# Altium PCB PCB.PcbDoc (part 3 of 3)
Units mm, origin at the board's own origin, x right, y up, seen from the top; angles counter-clockwise.
Board outline 152.4 x 101.6 mm, 2 copper layers (Top Layer, Bottom Layer); 124 components, 87 nets, 375 pads, 305 vias.
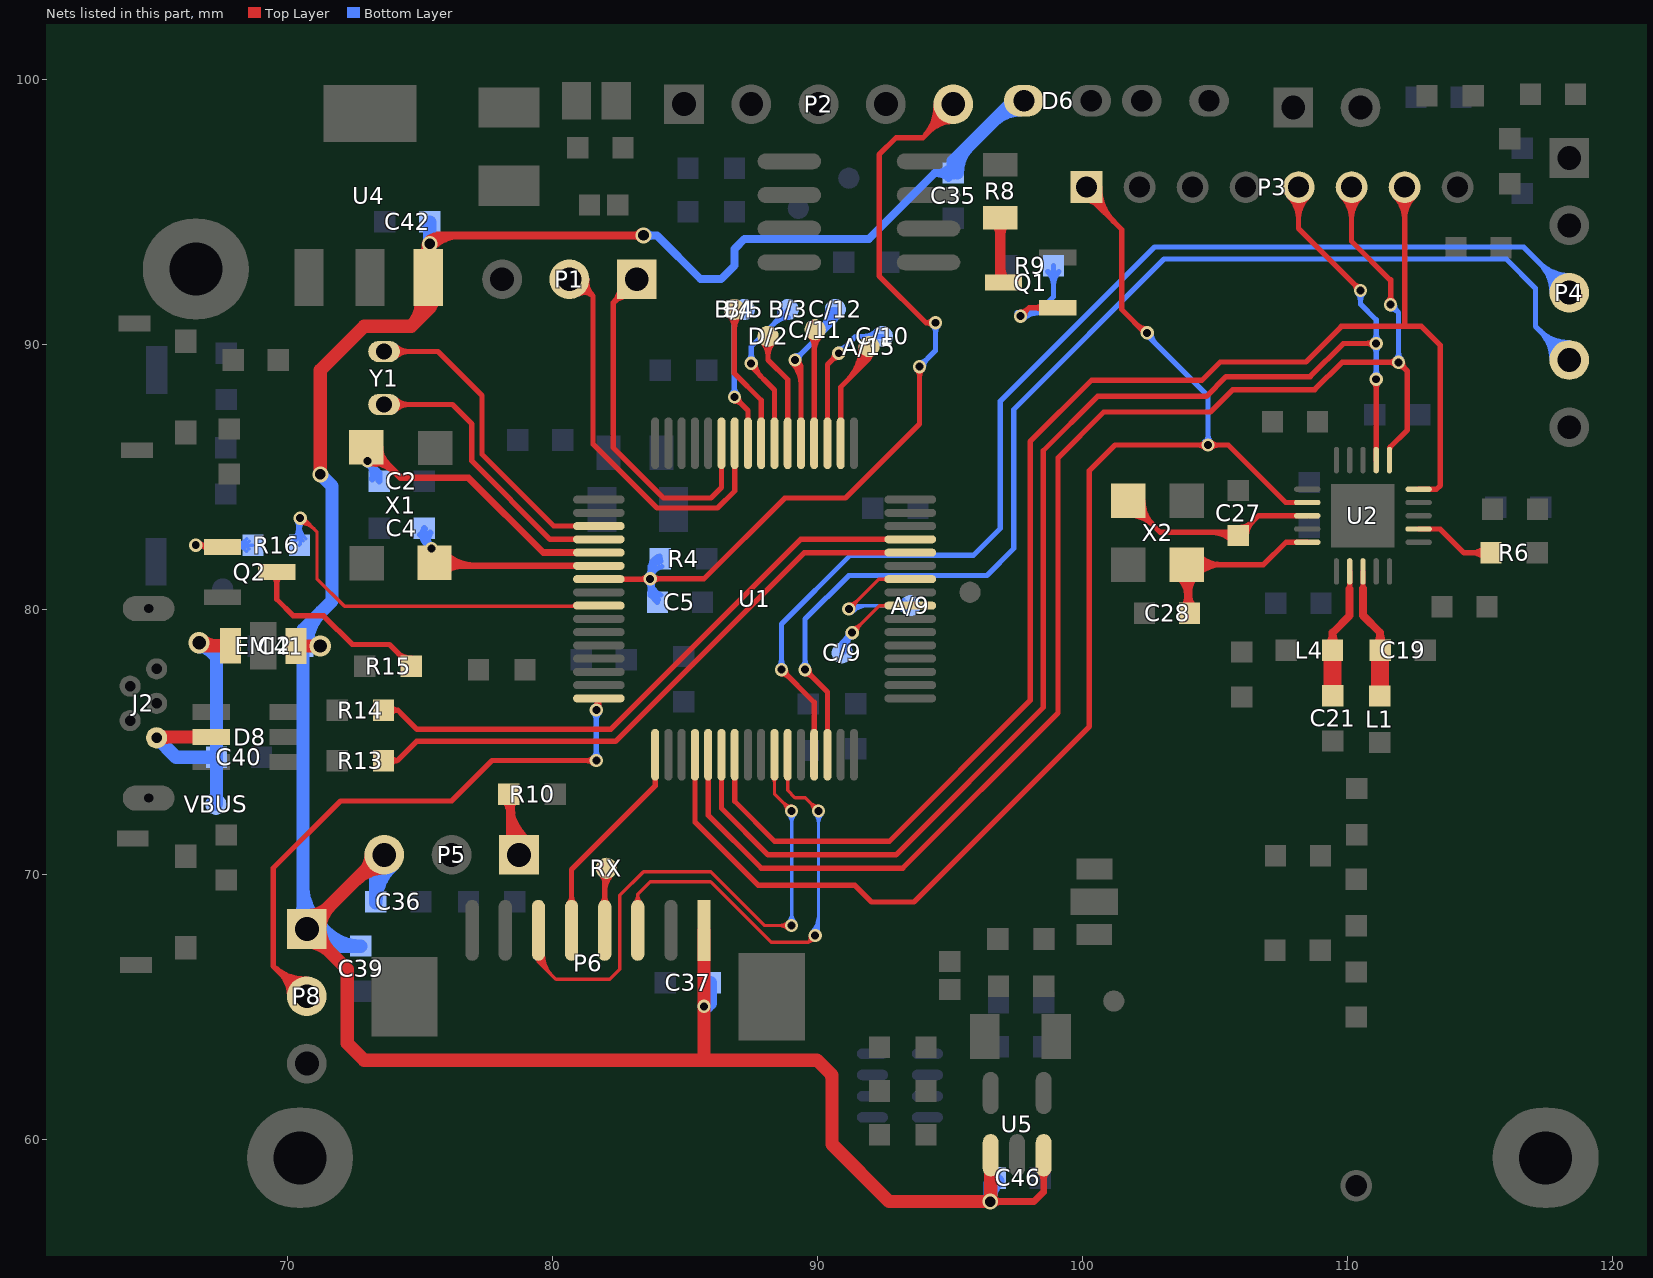
[diagram p3: the nets of this part, all layers, seen from the top]

## Via types
v1: diameter 0.5, hole 0.3, Top Layer to Bottom Layer, 278 vias
v2: diameter 0.6, hole 0.4, Top Layer to Bottom Layer, 23 vias
v3: diameter 0.8, hole 0.5, Top Layer to Bottom Layer, 2 vias
v4: diameter 0.8, hole 0.8, Top Layer to Bottom Layer, 2 vias

## Nets (pads, with @x,y where several pads share a name; then routed paths per layer and width w, separated by ;. In a path a pad name is that pad's centre, name@x,y a point inside that pad or via, vN(x,y) a via of type N, cw(c..) or ccw(c..) an arc to the next point about the centre after c; other vN are vias at no path point) (continued)
NetP5_1: P5.1 R10.1 | length 11.1
  Top Layer w0.2: R10.1@78.147,72.806 cw(c77.635,72.294) 78.359,72.294 cw(c79.083,72.294) R10.1@78.571,72.806 ; R10.1@78.196,72.767 cw(c77.8,72.154) 78.513,72.307 ; P5.1@78.28,71.199 ccw(c78.091,71.388) P5.1@78.359,71.388 ; 78.359,71.695 ccw(c79.584,71.695) P5.1@78.773,70.776 ; 78.359,72.138 ccw(c79.975,72.138) P5.1@78.905,70.926 ; 78.359,72.581 ccw(c80.367,72.581) P5.1@79.038,71.076 ; 78.512,72.314 cw(c79.215,72.465) R10.1@78.611,72.856 ; P5.1@78.74,70.739 78.359,71.12 R10.1@78.359,73.025 ccw(c80.759,73.025) P5.1@79.17,71.226
NetP6_4: P6.4 RX.1 | length 4.4
  Top Layer w0.2: RX.1@81.83,70.019 cw(c81.479,69.668) 81.975,69.668 ; P6.4@81.869,68.897 ccw(c81.613,69.153) 81.975,69.153 ccw(c82.337,69.153) P6.4@82.081,68.897 ; P6.4@81.975,67.891 81.975,70.164 RX.1@82.042,70.231 ; 81.975,69.345 cw(c82.928,69.345) RX.1@82.254,70.019 ; 81.975,69.828 cw(c82.445,69.828) RX.1@82.113,70.16
NetQ1_2: Q1.2 R9.2 | length 7.6
  Top Layer w0.2: v1(97.663,91.059) 97.983,91.379 Q1.2@99.069,91.379 ; v1@97.663,91.209 ccw(c97.663,91.571) 97.919,91.315 ccw(c98.175,91.059) v1@97.813,91.059 ; Q1.2@98.528,91.238 ccw(c98.186,90.896) 98.186,91.379 ccw(c98.186,91.862) Q1.2@98.528,91.52
  Bottom Layer w0.2: v1(97.663,91.059) 97.536,91.186 98.298,91.186 ; v1@97.773,90.957 cw(c98.298,90.47) 98.298,91.186 ; R9.2@98.693,92.745 cw(c98.181,92.233) 98.905,92.233 cw(c99.629,92.233) R9.2@99.117,92.745 ; R9.2@98.905,92.964 98.905,91.793 98.298,91.186
NetQ1_3: Q1.3 R8.1 | length 3.7
  Top Layer w0.4: R8.1@96.724,94.597 cw(c96.297,94.17) 96.901,94.17 cw(c97.505,94.17) R8.1@97.078,94.597 ; 96.901,92.855 ccw(c97.545,92.855) Q1.3@97.09,92.4 ; R8.1@96.901,94.488 96.901,92.329 Q1.3@97.019,92.329
NetQ2_2: Q2.2 R16.1 | length 8.3
  Top Layer w0.127: v1@66.68,82.291 cw(c66.998,81.973) 66.998,82.423 cw(c66.998,82.873) v1@66.68,82.555 ; v1@66.699,82.314 cw(c66.783,82.253) 66.81,82.353 cw(c66.837,82.453) v1@66.733,82.442 ; v1@66.718,82.5 ccw(c66.806,82.541) 66.832,82.447 ccw(c66.876,82.283) v1@66.719,82.349 ; v1@66.743,82.423 ccw(c66.743,82.769) Q2.2@66.988,82.524 ; 66.803,82.423 cw(c66.803,82.091) Q2.2@67.068,82.291 ; Q2.2@66.966,82.215 ccw(c66.548,81.899) v1(66.548,82.423) 67.489,82.423 Q2.2@67.555,82.357
  Bottom Layer w0.127: v1(66.548,82.423) R16.1@68.707,82.423 ; v1@66.68,82.291 cw(c66.998,81.973) 66.998,82.423 cw(c66.998,82.873) v1@66.68,82.555 ; R16.1@68.469,82.185 ccw(c67.895,81.611) 67.895,82.423 ccw(c67.895,83.235) R16.1@68.469,82.661 ; R16.1@68.559,82.275 ccw(c68.201,81.917) 68.201,82.423 ccw(c68.201,82.929) R16.1@68.559,82.571
NetQ2_3: Q2.3 R15.1 | length 9.2
  Top Layer w0.2: Q2.3@69.464,81.266 cw(c69.122,80.924) 69.605,80.924 cw(c70.088,80.924) Q2.3@69.746,81.266 ; Q2.3@69.605,81.407 69.605,80.382 70.231,79.756 71.374,79.756 72.453,78.676 73.85,78.676 R15.1@74.676,77.851 ; Q2.3@69.859,81.407 Q2.3@69.859,81.534 ; 74.153,78.374 ccw(c74.676,78.897) R15.1@74.676,78.157 ; 74.168,78.359 cw(c73.667,77.857) R15.1@74.376,77.857
NetR6_1: R6.1 U2.17 | length 4.2
  Top Layer w0.2: U2.17@112.681,83.03 113.494,83.03 114.391,82.133 R6.1@115.407,82.133 ; R6.1@115.195,81.921 ccw(c114.683,81.409) 114.683,82.133 ccw(c114.683,82.857) R6.1@115.195,82.345
NetTP9_1: C/9.1 U1.40 | length 7.3
  Top Layer w0.127: v1(91.313,79.121) 92.333,80.141 U1.40@93.505,80.141 ; v1@91.313,79.307 ccw(c91.313,79.758) 91.631,79.439 ccw(c91.95,79.121) v1@91.499,79.121 ; U1.40@92.619,80.08 ccw(c92.471,79.932) 92.471,80.141 ccw(c92.471,80.35) U1.40@92.619,80.202
  Bottom Layer w0.2: C/9.1@90.932,78.359 90.932,78.74 v1(91.313,79.121) ccw(c91.708,78.726) C/9.1@91.203,78.487 ; C/9.1@90.98,78.69 cw(c91.51,78.384) v1@91.352,78.976 ; C/9.1@91.022,78.402 cw(c91.435,78.597) 91.112,78.92 ; v1@91.163,79.121 cw(c90.801,79.121) 91.057,78.865 cw(c91.313,78.609) v1@91.313,78.971 ; v1@91.177,79.058 cw(c90.992,78.972) 91.168,78.871 cw(c91.345,78.769) v1@91.326,78.972
NRST: C5.1 P2.5 R4.1 U1.7 | length 45.2
  Top Layer w0.2: U1.7@81.755,81.141 v1@83.681,81.141 ; 83.302,81.141 ccw(c83.302,81.544) v1@83.587,81.259 ; 83.36,81.141 cw(c83.36,80.82) v1@83.587,81.047 ; v1(83.693,81.153) 85.725,81.153 88.773,84.201 91.059,84.201 93.853,86.995 v1(93.853,89.154) ; v1@83.799,81.047 cw(c84.055,80.791) 84.055,81.153 cw(c84.055,81.515) v1@83.799,81.259 ; v1@93.747,89.048 cw(c93.491,88.792) 93.853,88.792 cw(c94.215,88.792) v1@93.959,89.048 ; 94.23,98.04 cw(c95.123,97.147) P2.5@95.123,98.41 ; 94.306,98.116 ccw(c93.419,99.004) P2.5@94.673,99.045 ; v1@94.353,90.706 ccw(c94.1,90.457) 94.1,90.812 ; v1@94.353,90.917 cw(c94.1,91.166) 94.1,90.812 ; v1(94.459,90.812) 94.1,90.812 ; P2.5@94.473,99.039 cw(c92.787,98.983) 93.98,97.79 ; 94.572,98.382 cw(c95.123,97.83) P2.5@95.123,98.61 ; 94.632,98.442 ccw(c94.05,99.025) P2.5@94.873,99.052 ; P2.5@95.123,99.06 95.123,98.933 93.98,97.79 ; 93.98,97.79 92.964,97.79 92.329,97.155 92.329,92.583 94.1,90.812
  Bottom Layer w0.2: v1@83.587,81.047 cw(c83.331,80.791) 83.693,80.791 cw(c84.055,80.791) v1@83.799,81.047 ; v1@83.587,81.259 ccw(c83.331,81.515) 83.693,81.515 ccw(c84.055,81.515) v1@83.799,81.259 ; v1@83.618,81.283 ccw(c83.507,81.476) 83.722,81.418 ; v1@83.622,81.021 cw(c83.47,80.735) 83.783,80.819 cw(c84.095,80.903) v1@83.82,81.074 ; 83.693,80.843 ccw(c84.221,80.843) C5.1@84.004,80.362 ; v1@83.693,81.062 cw(c84.259,81.062) R4.1@84.138,81.615 ; v1@83.693,81.311 cw(c84.205,81.311) R4.1@84.095,81.811 ; R4.1@83.693,81.559 cw(c84.15,81.559) R4.1@84.053,82.006 ; 83.743,81.498 ccw(c83.995,81.431) v1@83.803,81.255 ; C5.1@83.963,80.264 83.693,80.534 v1(83.693,81.153) ; R4.1@84.074,81.915 83.693,81.534 v1(83.693,81.153) ; C5.1@84.086,80.544 cw(c84.361,81.153) v1(83.693,81.153) ; v1(93.853,89.154) 94.459,89.76 v1(94.459,90.812) ; v1@93.853,89.304 ccw(c93.853,89.666) 94.109,89.41 ccw(c94.365,89.154) v1@94.003,89.154 ; v1@94.353,90.706 cw(c94.097,90.45) 94.459,90.45 cw(c94.821,90.45) v1@94.565,90.706
PA9: A/9.1 U1.42 | length 9.4
  Top Layer w0.127: v1(91.186,80.01) 92.317,81.141 U1.42@93.505,81.141 ; v1@91.186,80.196 ccw(c91.186,80.647) 91.504,80.328 ccw(c91.823,80.01) v1@91.372,80.01 ; U1.42@92.619,81.08 ccw(c92.471,80.932) 92.471,81.141 ccw(c92.471,81.35) U1.42@92.619,81.202
  Bottom Layer w0.127: v1(91.186,80.01) 91.317,80.141 A/9.1@93.505,80.141 ; v1@91.228,79.968 cw(c91.646,79.55) 91.646,80.141 ; v1@91.318,79.878 cw(c91.953,79.243) 91.953,80.141 ; A/9.1@93.267,79.903 ccw(c92.693,79.329) 92.693,80.141 ccw(c92.693,80.953) A/9.1@93.267,80.379 ; A/9.1@93.357,79.993 ccw(c92.999,79.635) 92.999,80.141 ccw(c92.999,80.647) A/9.1@93.357,80.289
PA15: A/15.1 U1.50 | length 7.7
  Top Layer w0.2: U1.50@90.88,86.266 90.88,88.392 91.948,89.46 ; 91.113,88.625 ccw(c89.823,89.916) A/15.1@91.648,89.916 ; 91.455,88.967 ccw(c90.506,89.916) A/15.1@91.848,89.916 ; 91.796,89.308 ccw(c91.189,89.916) A/15.1@92.048,89.916 ; A/15.1@91.829,89.641 cw(c91.751,89.46) 91.948,89.46 ; A/15.1@91.948,89.916 91.948,89.46 ; A/15.1@92.067,89.641 ccw(c92.145,89.46) 91.948,89.46
PB3: B/3.1 U1.55 | length 8.2
  Top Layer w0.2: v1(87.503,89.281) 87.503,89.154 88.38,88.277 U1.55@88.38,86.266 ; v1@87.653,89.281 ccw(c88.322,89.281) 87.849,88.808
  Bottom Layer w0.2: v1@87.397,89.387 ccw(c87.141,89.643) 87.503,89.643 ccw(c87.865,89.643) v1@87.609,89.387 ; v1(87.503,89.281) 87.503,89.916 B/3.1@88.9,91.313 ; B/3.1@88.6,91.313 cw(c87.876,91.313) 88.388,90.801 cw(c88.9,90.289) B/3.1@88.9,91.013
PB4: B/4.1 U1.56 | length 6.6
  Top Layer w0.2: B/4.1@86.656,91.101 cw(c86.144,90.589) 86.868,90.589 cw(c87.592,90.589) B/4.1@87.08,91.101 ; B/4.1@86.868,91.313 86.868,88.9 87.88,87.888 U1.56@87.88,86.266
PB5: B/5.1 U1.57 | length 6.6
  Top Layer w0.2: v1@86.868,87.861 cw(c86.868,87.499) 87.124,87.755 cw(c87.38,88.011) v1@87.018,88.011 ; v1(86.868,88.011) 87.38,87.499 U1.57@87.38,86.266
  Bottom Layer w0.2: v1@86.762,88.117 ccw(c86.506,88.373) 86.868,88.373 ccw(c87.23,88.373) v1@86.974,88.117 ; v1(86.868,88.011) 86.868,90.932 B/5.1@87.249,91.313
PC10: C/10.1 U1.51 | length 7.8
  Top Layer w0.2: U1.51@90.38,86.266 90.38,89.237 v1(90.805,89.662) ; v1@90.655,89.662 cw(c90.293,89.662) 90.549,89.406 cw(c90.805,89.15) v1@90.805,89.512
  Bottom Layer w0.2: v1(90.805,89.662) 91.44,90.297 C/10.1@92.456,90.297 ; v1@90.805,89.812 ccw(c90.805,90.174) 91.061,89.918 ccw(c91.317,89.662) v1@90.955,89.662 ; C/10.1@92.244,90.085 ccw(c91.732,89.573) 91.732,90.297 ccw(c91.732,91.021) C/10.1@92.244,90.509
PC11: C/11.1 U1.52 | length 5.4
  Top Layer w0.2: C/11.1@89.704,90.339 cw(c89.279,89.914) 89.88,89.914 ; U1.52@89.88,86.266 89.88,90.515 C/11.1@89.916,90.551 ; 89.88,89.74 cw(c90.727,89.74) C/11.1@90.128,90.339
PC12: C/12.1 U1.53 | length 10.9
  Top Layer w0.2: v1@89.048,89.302 cw(c88.246,88.5) 89.38,88.5 ; v1(89.154,89.408) 89.38,89.182 ; v1@89.168,89.259 cw(c89.192,88.994) 89.38,89.182 ; v1@89.189,89.443 cw(c88.729,88.983) 89.38,88.983 ; v1@89.303,89.394 ccw(c89.568,89.37) 89.38,89.182 ; U1.53@89.38,86.266 89.38,89.182
  Bottom Layer w0.2: v1(89.154,89.408) 90.678,90.932 C/12.1@90.678,91.313 ; v1@89.154,89.558 ccw(c89.154,89.92) 89.41,89.664 ccw(c89.666,89.408) v1@89.304,89.408 ; 89.896,90.15 ccw(c88.734,91.313) C/12.1@90.378,91.313 ; 90.238,90.492 ccw(c89.417,91.313) C/12.1@90.578,91.313 ; 90.579,90.833 ccw(c90.1,91.313) C/12.1@90.778,91.313
PD2: D/2.1 U1.54 | length 5.5
  Top Layer w0.2: D/2.1@87.926,90.085 cw(c87.414,89.573) 88.138,89.573 cw(c88.862,89.573) D/2.1@88.35,90.085 ; D/2.1@88.138,90.297 88.138,89.408 88.88,88.666 U1.54@88.88,86.266
PM25_RESET: P6.6 U1.26 | length 27.3
  Top Layer w0.127: P6.6@79.398,66.821 cw(c79.344,66.702) 79.475,66.702 ; P6.6@79.407,66.991 ccw(c79.942,66.991) 79.564,66.613 ; P6.6@79.475,67.891 79.475,66.702 ; P6.6@79.534,66.991 ccw(c80.376,66.991) 79.781,66.396 ; P6.6@79.552,66.821 ccw(c79.606,66.702) 79.475,66.702 ; P6.6@79.661,66.991 ccw(c80.809,66.991) 79.998,66.179 ; U1.26@88.319,73.63 cw(c88.171,73.482) 88.38,73.482 cw(c88.589,73.482) U1.26@88.441,73.63 ; U1.26@88.38,74.516 88.38,73.037 v1(89.027,72.39) ; v1@88.841,72.39 ccw(c88.39,72.39) 88.709,72.708 ccw(c89.027,73.027) v1@89.027,72.576 ; v1@88.895,67.94 ccw(c88.577,67.622) 88.577,68.072 ccw(c88.577,68.522) v1@88.895,68.204 ; v1(89.027,68.072) 88.011,68.072 85.979,70.104 83.439,70.104 82.55,69.215 82.55,66.421 82.169,66.04 80.137,66.04 79.475,66.702
  Bottom Layer w0.127: v1@88.895,68.204 ccw(c88.577,68.522) 89.027,68.522 ccw(c89.477,68.522) v1@89.159,68.204 ; v1@88.895,72.258 cw(c88.577,71.94) 89.027,71.94 cw(c89.477,71.94) v1@89.159,72.258 ; v1@88.971,68.25 ccw(c88.947,68.326) 89.027,68.326 ; v1(89.027,72.39) 89.027,68.326 ; v1@89.083,68.25 cw(c89.107,68.326) 89.027,68.326
PM25_SET: P6.3 U1.27 | length 20.9
  Top Layer w0.127: P6.3@83.093,68.923 ccw(c82.775,69.241) 83.225,69.241 ccw(c83.675,69.241) P6.3@83.357,68.923 ; P6.3@83.225,67.891 83.225,69.255 83.693,69.723 85.968,69.723 88.254,67.437 89.662,67.437 ; U1.27@88.819,73.63 cw(c88.671,73.482) 88.88,73.482 cw(c89.089,73.482) U1.27@88.941,73.63 ; U1.27@88.88,74.516 88.88,73.172 89.154,72.898 89.535,72.898 v1(90.043,72.39) ; v1@89.732,67.659 cw(c89.483,67.616) 89.662,67.437 ; v1@89.857,72.39 ccw(c89.406,72.39) 89.725,72.708 ccw(c90.043,73.027) v1@90.043,72.576 ; v1@89.884,67.507 ccw(c89.841,67.258) 89.662,67.437 ; v1(89.916,67.691) 89.662,67.437
  Bottom Layer w0.127: v1@89.784,67.823 ccw(c89.159,68.448) 90.043,68.448 ; v1@89.874,67.733 ccw(c89.466,68.141) 90.043,68.141 ; v1@89.911,72.258 cw(c89.593,71.94) 90.043,71.94 cw(c90.493,71.94) v1@90.175,72.258 ; v1@90.043,67.691 v1(90.043,72.39)
RF_XQ1: C27.1 U2.8 X2.1 | length 13.8
  Top Layer w0.2: X2.1@101.734,83.555 cw(c101.734,82.227) 102.673,83.166 cw(c103.612,84.105) X2.1@102.284,84.105 ; X2.1@101.734,83.755 cw(c101.734,82.91) 102.332,83.508 cw(c102.929,84.105) X2.1@102.084,84.105 ; X2.1@101.734,84.105 102.933,82.907 105.76,82.907 C27.1@105.882,82.784 105.898,82.784 106.644,83.53 U2.8@108.481,83.53 ; 104.856,82.907 cw(c104.856,81.764) C27.1@105.664,82.572 ; 105.339,82.907 cw(c105.339,82.247) C27.1@105.805,82.713 ; 105.448,82.907 ccw(c105.448,83.212) C27.1@105.664,82.996 ; C27.1@105.889,83.084 ccw(c105.889,83.831) 106.417,83.303 ; C27.1@106.189,82.784 cw(c106.89,82.784) 106.394,83.28
RF_XQ2: C28.2 U2.10 X2.3 | length 15.5
  Top Layer w0.2: X2.3@103.545,81.296 cw(c102.346,80.096) C28.2@104.042,80.096 ; X2.3@103.687,81.438 cw(c102.829,80.579) 104.042,80.579 ; C28.2@103.788,80.013 ccw(c103.018,80.496) 103.904,80.699 ; C28.2@103.83,80.066 ccw(c103.318,80.578) 104.042,80.578 ccw(c104.767,80.578) C28.2@104.255,80.066 ; 103.963,80.444 ccw(c104.488,80.564) C28.2@104.202,80.108 ; C28.2@104.042,79.847 104.042,81.577 X2.3@103.934,81.685 106.831,81.685 107.676,82.53 U2.10@108.481,82.53 ; 104.042,80.618 cw(c105.001,80.618) 104.323,81.296 cw(c105.262,80.357) 105.262,81.685 cw(c105.262,83.013) X2.3@104.323,82.074 ; X2.3@104.182,81.438 cw(c104.779,80.84) 104.779,81.685 cw(c104.779,82.53) X2.3@104.182,81.932
RFO_N: C19.1 L1.1 U2.13 | length 5.9
  Top Layer w0.2: 110.581,80.778 U2.13@110.581,81.43
  Top Layer w0.3: 110.581,80.778 110.581,79.772 111.232,79.121 C19.1@111.232,78.45 ; C19.1@111.056,78.633 ccw(c110.629,79.06) 111.232,79.06 ccw(c111.836,79.06) C19.1@111.409,78.633
  Top Layer w0.68: L1.1@111.216,76.73 111.232,76.746 C19.1@111.232,78.45
RFO_P: C21.2 L4.1 U2.12 | length 5.9
  Top Layer w0.2: 110.081,80.762 U2.12@110.081,81.43
  Top Layer w0.3: L4.1@109.262,78.633 ccw(c108.835,79.06) 109.438,79.06 ccw(c110.042,79.06) L4.1@109.615,78.633 ; L4.1@109.438,78.45 109.438,79.121 110.081,79.764 110.081,80.762
  Top Layer w0.68: C21.2@109.438,76.737 L4.1@109.438,78.45
SPI1_CS: P3.1 U1.20 U2.7 | length 58.7
  Top Layer w0.2: U1.20@85.38,74.516 85.38,71.973 87.757,69.596 91.404,69.596 92.039,68.961 93.642,68.961 100.261,75.579 100.261,85.233 101.225,86.197 v1(104.739,86.197) 105.501,86.197 107.668,84.03 U2.7@108.481,84.03 ; P3.1@100.153,95.428 cw(c100.153,94.875) 100.545,95.266 ; P3.1@100.153,95.928 100.153,95.657 101.484,94.327 101.484,91.31 v1@102.402,90.391 ; P3.1@100.253,95.928 ccw(c101.149,95.928) 100.516,95.295 ; P3.1@100.453,95.928 ccw(c101.832,95.928) 100.857,94.954 ; P3.1@100.653,95.928 ccw(c102.515,95.928) 101.199,94.612 ; 102.051,90.743 ccw(c102.442,91.133) v1@102.442,90.581 ; v1@104.633,86.091 ccw(c104.377,85.835) 104.377,86.197 ccw(c104.377,86.559) v1@104.633,86.303 ; v1@104.845,86.091 cw(c105.102,85.835) 105.102,86.197 cw(c105.102,86.559) v1@104.845,86.303
  Bottom Layer w0.2: v1@102.402,90.391 104.739,88.054 v1(104.739,86.197) v1@104.612,86.324 ; v1@102.592,90.431 ccw(c103.144,90.431) 102.754,90.04 ; v1@104.633,86.303 ccw(c104.377,86.559) 104.739,86.559 ccw(c105.102,86.559) v1@104.845,86.303
  other v1: 102.442,90.431
SPI1_MISO: P3.5 U1.22 U2.2 | length 59.6
  Top Layer w0.2: U1.22@86.38,74.516 86.38,72.497 88.138,70.739 92.964,70.739 98.522,76.297 98.522,85.985 100.573,88.036 104.674,88.036 105.417,88.779 108.589,88.779 109.842,90.032 v1(111.081,90.032) ; P3.5@107.8,95.575 cw(c106.946,94.721) 108.153,94.721 cw(c109.361,94.721) P3.5@108.507,95.575 ; P3.5@107.941,95.716 cw(c107.429,95.204) 108.153,95.204 cw(c108.878,95.204) P3.5@108.366,95.716 ; P3.5@108.153,95.928 108.153,94.365 v1(110.49,92.028) ; v1@110.34,92.028 ccw(c109.978,92.028) 110.234,92.284 ccw(c110.49,92.54) v1@110.49,92.178 ; v1@110.975,88.576 cw(c110.719,88.319) 111.081,88.319 cw(c111.443,88.32) v1@111.187,88.576 ; v1@110.975,89.926 ccw(c110.719,89.67) 110.719,90.032 ccw(c110.719,90.394) v1@110.975,90.138 ; U2.2@111.081,85.63 v1(111.081,88.682)
  Bottom Layer w0.2: v1@110.384,91.922 cw(c110.128,91.666) 110.49,91.666 cw(c110.852,91.666) v1@110.596,91.922 ; v1(110.49,92.028) 110.49,91.516 111.081,90.925 v1(111.081,90.032) v1(111.081,88.682) ; v1@110.975,88.788 ccw(c110.719,89.044) 111.081,89.044 ccw(c111.443,89.044) v1@111.187,88.788 ; v1@110.975,89.926 cw(c110.719,89.67) 111.081,89.67 cw(c111.443,89.67) v1@111.187,89.926 ; v1@110.975,90.138 ccw(c110.719,90.394) 111.081,90.394 ccw(c111.443,90.394) v1@111.187,90.138
SPI1_MOSI: P3.7 U1.23 U2.20 | length 57.5
  Top Layer w0.2: U1.23@86.88,74.516 86.88,72.759 88.392,71.247 92.71,71.247 98.026,76.563 98.026,86.329 100.341,88.644 104.505,88.644 105.196,89.335 108.433,89.335 109.766,90.668 ; 109.766,90.678 112.195,90.678 ; P3.7@111.8,95.575 cw(c110.946,94.721) 112.153,94.721 cw(c113.361,94.721) P3.7@112.507,95.575 ; P3.7@111.941,95.716 cw(c111.429,95.204) 112.153,95.204 cw(c112.878,95.204) P3.7@112.366,95.716 ; P3.7@112.153,95.928 112.153,90.719 112.195,90.678 ; U2.20@112.681,84.53 113.359,84.53 113.502,84.673 113.502,89.959 112.783,90.678 112.195,90.678
SPI1_SCLK: P3.6 U1.21 U2.1 | length 60.1
  Top Layer w0.2: U1.21@85.88,74.516 85.88,72.235 87.884,70.231 93.218,70.231 99.075,76.088 99.075,85.716 100.802,87.443 104.827,87.443 105.674,88.29 108.76,88.29 109.789,89.318 v1(111.926,89.318) 112.257,88.987 112.257,86.772 111.581,86.096 U2.1@111.581,85.63 ; P3.6@109.8,95.575 cw(c108.946,94.721) 110.153,94.721 cw(c111.361,94.721) P3.6@110.507,95.575 ; P3.6@109.941,95.716 cw(c109.429,95.204) 110.153,95.204 cw(c110.878,95.204) P3.6@110.366,95.716 ; P3.6@110.153,95.928 110.153,93.885 111.607,92.432 ; v1@111.519,91.6 ccw(c111.263,91.856) 111.625,91.856 ccw(c111.987,91.856) v1@111.731,91.6 ; U2.1@111.581,86.03 cw(c111.74,86.03) 111.628,86.142 ; v1(111.625,91.494) 111.625,92.432 ; v1@111.82,89.212 ccw(c111.564,88.956) 111.564,89.318 ccw(c111.564,89.681) v1@111.82,89.425 ; v1@111.926,89.168 cw(c111.926,88.806) 112.182,89.062 cw(c112.438,89.318) v1@112.076,89.318
  Bottom Layer w0.2: v1@111.625,91.344 cw(c111.625,90.982) 111.881,91.238 cw(c112.137,91.494) v1@111.775,91.494 ; v1(111.625,91.494) 111.926,91.193 v1(111.926,89.318) ; v1@111.82,89.425 ccw(c111.564,89.681) 111.926,89.681 ccw(c112.288,89.681) v1@112.032,89.425
U2_RX_PM25_TX: P6.5 U1.17 | length 8.5
  Top Layer w0.2: P6.5@80.619,68.897 ccw(c80.363,69.153) 80.725,69.153 ccw(c81.087,69.153) P6.5@80.831,68.897 ; P6.5@80.725,67.891 80.725,70.184 83.88,73.339 U1.17@83.88,74.516
U2_TX_LCD_RX: P8.2 U1.16 | length 28.5
  Top Layer w0.2: 69.719,66.298 cw(c68.826,65.405) P8.2@70.089,65.405 ; 69.795,66.222 ccw(c70.683,67.109) P8.2@70.724,65.855 ; 70.061,65.956 cw(c69.509,65.405) P8.2@70.289,65.405 ; 70.121,65.896 ccw(c70.704,66.478) P8.2@70.731,65.655 ; P8.2@70.718,66.055 cw(c70.662,67.741) 69.469,66.548 ; P8.2@70.739,65.405 70.612,65.405 69.469,66.548 ; v1@81.555,74.189 ccw(c81.299,73.933) 81.299,74.295 ccw(c81.299,74.657) v1@81.555,74.401 ; v1@81.581,76.327 ccw(c81.384,76.641) U1.16@81.755,76.641 81.755,76.294 v1(81.661,76.2) ; v1(81.661,74.295) 77.724,74.295 76.2,72.771 72.009,72.771 69.469,70.231 69.469,66.548
  Bottom Layer w0.2: v1@81.555,74.401 ccw(c81.299,74.657) 81.661,74.657 ccw(c82.023,74.657) v1@81.767,74.401 ; v1@81.555,76.094 cw(c81.299,75.838) 81.661,75.838 cw(c82.023,75.838) v1@81.767,76.094 ; v1(81.661,74.295) v1(81.661,76.2)
U3_RX_CO2_TX: P4.3 U1.29 | length 49.9
  Top Layer w0.2: v1@88.646,77.574 cw(c88.646,77.212) 88.902,77.468 cw(c89.158,77.724) v1@88.796,77.724 ; v1(88.646,77.724) 89.88,76.49 U1.29@89.88,74.516
  Bottom Layer w0.2: v1@88.54,77.83 ccw(c88.284,78.086) 88.646,78.086 ccw(c89.008,78.086) v1@88.752,77.83 ; v1(88.646,77.724) 88.646,79.447 91.241,82.042 95.885,82.042 96.901,83.058 96.901,87.856 102.714,93.669 116.643,93.669 P4.3@118.364,91.948 ; P4.3@117.714,91.948 ccw(c116.145,91.948) 117.254,93.058 ccw(c118.364,94.167) P4.3@118.364,92.598 ; P4.3@117.914,91.948 ccw(c116.828,91.948) 117.596,92.716 ccw(c118.364,93.484) P4.3@118.364,92.398
U3_TX_CO2_RX: P4.4 U1.30 | length 50.7
  Top Layer w0.2: v1@89.535,77.574 cw(c89.535,77.212) 89.791,77.468 cw(c90.047,77.724) v1@89.685,77.724 ; v1(89.535,77.724) 90.38,76.879 U1.30@90.38,74.516
  Bottom Layer w0.2: v1@89.429,77.83 ccw(c89.173,78.086) 89.535,78.086 ccw(c89.897,78.086) v1@89.641,77.83 ; v1(89.535,77.724) 89.535,79.629 91.186,81.28 96.393,81.28 97.409,82.296 97.409,87.542 103.083,93.216 115.99,93.216 117.094,92.111 117.094,90.678 P4.4@118.364,89.408 ; P4.4@117.714,89.408 ccw(c116.145,89.408) 117.254,90.518 ccw(c118.364,91.627) P4.4@118.364,90.058 ; P4.4@117.914,89.408 ccw(c116.828,89.408) 117.596,90.176 ccw(c118.364,90.944) P4.4@118.364,89.858
UART1_RX: P1.1 U1.59 | length 16.6
  Top Layer w0.2: P1.1@82.544,92.347 cw(c81.666,92.197) 82.296,91.567 ; P1.1@82.741,92.38 cw(c82.134,92.277) 82.57,91.841 cw(c83.006,91.405) P1.1@83.109,92.012 ; P1.1@83.076,91.815 ccw(c82.926,90.937) 82.296,91.567 ; P1.1@83.185,92.71 P1.1@83.185,92.456 82.296,91.567 ; U1.59@86.38,86.266 86.38,84.602 85.979,84.201 84.201,84.201 82.296,86.106 82.296,91.567
UART1_TX: P1.2 U1.58 | length 17.1
  Top Layer w0.2: P1.2@80.645,92.71 81.534,91.821 ; P1.2@80.871,92.067 cw(c81.07,91.725) 81.35,92.005 ; P1.2@80.972,91.894 cw(c81.205,91.492) 81.534,91.821 ; P1.2@81.295,92.431 ccw(c82.113,92.4) 81.534,91.821 ; U1.58@86.88,86.266 86.88,84.467 86.233,83.82 83.947,83.82 81.534,86.233 81.534,91.821
USB_CTRL: R16.2 U1.9 | length 19.4
  Top Layer w0.127: v1@70.485,83.253 cw(c70.485,82.496) 71.02,83.031 ; v1@70.485,83.38 cw(c70.485,82.929) 70.803,83.248 ; v1(70.485,83.439) 70.612,83.439 71.12,82.931 71.12,81.153 72.159,80.114 81.728,80.114 U1.9@81.755,80.141 ; 80.656,80.114 ccw(c80.656,80.415) U1.9@80.869,80.202
  Bottom Layer w0.127: R16.2@70.219,82.667 ccw(c69.577,83.309) v1@70.485,83.309 ; R16.2@70.309,82.578 ccw(c69.884,83.003) 70.485,83.003 ; v1@70.323,83.346 cw(c69.834,83.063) 70.38,82.917 ; v1@70.353,83.307 cw(c70.035,82.989) 70.485,82.989 cw(c70.935,82.989) v1@70.617,83.307 ; 70.422,83.074 cw(c70.746,82.987) v1@70.578,83.277 ; R16.2@70.457,82.423 70.485,82.451 v1(70.485,83.439) ; 70.485,82.868 ccw(c70.895,82.868) R16.2@70.605,82.578 ; 70.485,83.174 ccw(c71.202,83.174) R16.2@70.695,82.667
USB_FS_D_N: R13.2 U1.44 | length 23.8
  Top Layer w0.2: R13.2@73.632,74.295 74.151,74.295 ; R13.2@73.892,74.145 cw(c74.151,73.996) 74.151,74.295 ; R13.2@73.892,74.445 ccw(c74.151,74.594) 74.151,74.295 ; U1.44@93.505,82.141 89.507,82.141 82.387,75.021 74.877,75.021 74.151,74.295
USB_FS_D_P: R14.2 U1.45 | length 23.8
  Top Layer w0.2: R14.2@73.632,76.2 74.168,76.2 ; R14.2@73.888,76.043 cw(c74.168,75.871) 74.168,76.2 ; R14.2@73.888,76.357 ccw(c74.168,76.529) 74.168,76.2 ; U1.45@93.505,82.641 89.372,82.641 89.326,82.595 89.319,82.595 82.198,75.474 74.894,75.474 74.712,75.656 74.349,76.019 74.168,76.2
VBUS: C35.2 C36.2 C37.1 C39.1 C41.1 C42.2 C46.2 D6.1 EMI2.1 P5.3 P6.1 P8.1 U4.3 U5.1 U5.3 | length 141.2
  Top Layer w0.254: v2(96.52,57.658) 98.171,57.658 98.536,58.023 U5.3@98.536,59.404 ; v2@96.642,57.536 cw(c96.938,57.24) 96.938,57.658 cw(c96.938,58.076) v2@96.642,57.78 ; U5.3@98.414,58.782 cw(c98.118,58.486) 98.536,58.486 cw(c98.954,58.486) U5.3@98.658,58.782
  Top Layer w0.3: v2@75.27,93.897 cw(c75.777,93.39) 75.777,94.107 ; v2(75.376,93.791) 75.692,94.107 v2(83.439,94.107) ; v2@75.376,93.941 ccw(c75.376,94.303) 75.632,94.047 ccw(c75.888,93.791) v2@75.526,93.791 ; v2@75.482,93.685 cw(c76.501,92.666) 76.501,94.107 ; v2@83.333,94.001 ccw(c83.077,93.745) 83.077,94.107 ccw(c83.077,94.469) v2@83.333,94.213
  Top Layer w0.5: EMI2.1@70.328,78.613 v3(71.247,78.613) ; P8.1@70.739,67.445 cw(c70.739,66.238) 71.593,67.091 cw(c72.446,67.945) 71.239,67.945 cw(c72.446,67.945) 71.593,68.799 cw(c70.739,69.652) P8.1@70.739,68.445 ; v2(71.247,85.09) 71.247,89.027 72.898,90.678 74.676,90.678 ; 72.59,69.796 cw(c73.66,68.725) P5.3@73.66,70.239 ; 72.896,70.102 ccw(c72.26,70.739) P5.3@73.16,70.739 ; P5.3@73.66,71.12 73.66,70.866 P8.1@70.739,67.945 72.263,66.421 72.263,63.627 72.898,62.992 89.988,62.992 90.543,62.437 90.543,62.365 90.551,62.357 90.551,59.817 92.71,57.658 v2(96.52,57.658) 96.536,57.674 U5.1@96.536,59.404 ; U4.3@75.025,91.917 cw(c73.745,91.609) 74.676,90.678 ; U4.3@75.111,93.255 ccw(c74.662,93.732) v2@75.317,93.732 ; U4.3@75.118,91.763 cw(c74.723,91.319) 75.317,91.319 ; 75.307,91.309 ccw(c74.763,91.854) U4.3@75.511,92.034 ; v2(75.376,93.791) v2@75.317,93.732 ; U4.3@75.516,91.763 ccw(c75.911,91.319) 75.317,91.319 ; U4.3@75.523,93.255 cw(c75.972,93.732) v2@75.317,93.732 ; 85.725,62.992 v1(85.725,65.024) P6.1@85.725,67.891 ; 74.676,90.678 75.317,91.319 ; 75.317,91.319 U4.3@75.317,92.512 v2@75.317,93.732
  Bottom Layer w0.3: v2(83.439,94.107) 83.947,94.107 85.598,92.456 86.36,92.456 86.868,92.964 86.868,93.599 87.249,93.98 91.948,93.98 94.426,96.458 C35.2@95.123,96.458 ; v2@83.545,94.001 cw(c83.801,93.745) 83.801,94.107 cw(c83.801,94.469) v2@83.545,94.213 ; C35.2@94.94,96.281 ccw(c94.513,95.854) 94.513,96.458 ccw(c94.513,97.062) C35.2@94.94,96.635
  Bottom Layer w0.5: C41.1@70.246,78.619 cw(c70.88,78.619) 70.432,79.068 ; P8.1@70.385,68.299 ccw(c69.877,68.807) 70.596,68.807 ; 70.596,69.497 ccw(c72.291,69.497) P8.1@71.093,68.299 ; C41.1@70.746,78.619 cw(c72.587,78.619) 71.285,79.921 ; P8.1@71.168,68.202 ccw(c72.771,69.163) C39.1@72.771,67.294 71.39,67.294 P8.1@70.739,67.945 ; v3(71.247,78.613) C41.1@70.596,78.613 ; v2(71.247,85.09) 71.691,84.645 71.691,80.328 70.596,79.232 C41.1@70.596,78.613 ; 71.888,67.294 cw(c71.888,68.634) P8.1@70.739,67.945 ; C36.2@73.341,68.933 cw(c75.242,68.933) P5.3@73.989,70.363 ; C36.2@73.341,68.961 73.341,70.42 P5.3@73.66,70.739 ccw(c74.276,70.035) 73.341,70.035 ; v2(75.376,93.791) C42.2@75.376,94.615 ; C37.1@85.963,65.599 cw(c85.15,65.599) v1(85.725,65.024) 85.852,65.024 85.963,65.135 C37.1@85.963,65.913 ; C35.2@95.123,96.458 95.123,96.901 97.409,99.187 D6.1@97.79,99.187 ; C35.2@95.279,96.458 cw(c96.727,96.458) 95.703,97.481 ; v2(96.52,57.658) 96.52,58.358 C46.2@96.709,58.547 ; v2@96.52,57.722 cw(c97.527,57.722) C46.2@96.815,58.434 ; 96.648,98.426 cw(c97.64,97.434) D6.1@97.64,98.837 ; C41.1@70.596,78.613 70.596,68.088 P8.1@70.739,67.945
VBUS_IN: C40.1 D8.5 EMI2.3 J2.1 VBUS.1 | length 14
  Top Layer w0.5: J2.1@65.07,75.154 65.1,75.184 D8.5@67.13,75.184 ; J2.1@65.176,75.048 cw(c65.505,74.719) 65.505,75.184 ; v3(66.675,78.74) 66.792,78.623 EMI2.3@67.858,78.623 ; v3@66.781,78.846 ccw(c67.32,79.385) 67.32,78.623
  Bottom Layer w0.5: J2.1@65.07,75.154 65.802,74.422 C40.1@67.326,74.422 ; v3@66.675,78.59 cw(c66.675,77.921) 67.148,78.394 ; v3@66.802,78.74 67.326,78.216 C40.1@67.326,74.422 ; VBUS.1@67.204,72.75 ccw(c66.909,73.045) 67.326,73.045 ; VBUS.1@67.31,72.644 67.326,72.66 C40.1@67.326,74.422
XT1: C4.1 U1.6 X1.1 | length 12.7
  Top Layer w0.254: X1.1@75.555,81.757 75.671,81.641 U1.6@81.755,81.641 ; X1.1@75.745,81.947 ccw(c76.484,82.686) 76.484,81.641 ; X1.1@75.925,81.387 cw(c76.538,80.774) 76.538,81.641 ; X1.1@75.925,82.127 ccw(c77.098,83.3) 77.098,81.641
  Bottom Layer w0.254: C4.1@75.026,82.818 cw(c74.873,82.566) 75.168,82.566 ; C4.1@75.129,82.676 ccw(c75.615,82.957) v1@75.47,82.415 ; C4.1@75.168,83.058 75.168,82.566 ; C4.1@75.183,83.04 ccw(c75.519,82.799) 75.227,82.507 ; C4.1@75.31,82.818 ccw(c75.463,82.566) 75.168,82.566 ; v1@75.315,82.296 ccw(c75.018,82.296) 75.228,82.506 ccw(c75.438,82.716) v1@75.438,82.419 ; C4.1@75.39,82.892 ccw(c75.764,82.623) v1(75.438,82.296) 75.168,82.566
XT2: C2.2 U1.5 X1.3 | length 17.7
  Top Layer w0.254: X1.3@72.919,85.675 cw(c73.149,85.507) X1.3@73.277,85.762 ; X1.3@72.975,85.594 cw(c72.975,83.931) 74.151,85.107 ; X1.3@72.975,85.848 cw(c72.975,84.798) 73.718,85.54 ; X1.3@72.975,86.117 73.141,86.117 74.295,84.963 76.835,84.963 79.657,82.141 U1.5@81.755,82.141 ; X1.3@73.086,85.491 cw(c73.206,85.284) X1.3@73.268,85.515 ; X1.3@73.124,85.525 cw(c73.395,85.328) X1.3@73.545,85.627 ; X1.3@73.132,85.659 ccw(c73.438,85.837) X1.3@73.347,85.494 ; X1.3@73.498,86.117 ccw(c74.36,86.117) 73.75,85.508
  Bottom Layer w0.254: v1@72.993,85.479 cw(c72.916,85.192) 73.173,85.341 ; v1@73.025,85.475 cw(c73.025,85.178) 73.235,85.388 cw(c73.445,85.598) v1@73.148,85.598 ; v1@73.144,85.566 ccw(c73.431,85.489) 73.173,85.341 ; C2.2@73.205,84.915 ccw(c72.529,85.102) v1(73.025,85.598) 73.468,85.155 C2.2@73.468,84.836 ; 73.333,85.29 cw(c73.012,84.969) C2.2@73.45,84.848
XT32K1: U1.4 Y1.1 | length 12.2
  Top Layer w0.2: Y1.1@73.652,87.727 76.23,87.727 76.962,86.995 76.962,85.598 79.919,82.641 U1.4@81.755,82.641 ; Y1.1@74.064,87.515 cw(c74.576,87.003) 74.576,87.727 cw(c74.576,88.451) Y1.1@74.064,87.939
XT32K2: U1.3 Y1.2 | length 13.3
  Top Layer w0.2: Y1.2@73.652,89.727 75.684,89.727 77.343,88.068 77.343,85.852 80.054,83.141 U1.3@81.755,83.141 ; Y1.2@74.064,89.515 cw(c74.576,89.003) 74.576,89.727 cw(c74.576,90.451) Y1.2@74.064,89.939
pads on no net: D8.1 D8.3 J2.4 P6. P6.7 P6.8 RP1.6 U1.15 U1.36 U1.38 U5.4
copper on no net:
  other v4: 64.77,68.111 64.77,69.811

## Polygon pours and split planes (outlines as drawn)
GND on Bottom Layer "Top Layer-No Net" (solid, remove dead copper, pour order 4): 70.739,100.211 119.243,100.211 119.355,100.099 119.888,99.566 119.888,99.187 119.888,94.192 119.884,94.189 98.529,94.189 98.519,94.179 98.314,94.179 98.314,94.178 98.314,57.009 98.316,57.007 90.845,57.007 90.759,57.094 90.048,57.805 90.048,58.411 90.048,62.225 90.043,62.23 72.771,62.23 72.771,57.786 72.484,57.5 72.02,57.035 71.218,57.035 68.85,57.035 68.287,57.598 68.221,57.664 68.221,59.433 68.221,65.637 68.199,65.659 64.15,65.659 63.523,66.286 63.51,66.299 63.51,67.216 63.51,93.716 63.5,93.726 63.5,94.165 64.097,94.762 64.198,94.863 65.172,94.863 69.209,94.863 69.215,94.869 69.23,94.884 69.23,99.408 69.23,99.516 69.877,100.163 69.917,100.203 70.358,100.203
CGND on Bottom Layer "Top Layer-No Net" (solid, remove dead copper, pour order 6): 98.314,94.178 119.905,94.178 119.906,94.177 119.906,57.834 119.228,57.156 119.11,57.038 116.881,57.038 98.394,57.038 98.329,57.104
CGND on Top Layer "Top Layer-No Net" (solid, remove dead copper, pour order 8): 98.891,57.009 98.905,57.023 118.745,57.023 119.201,57.023 119.84,57.661 119.915,57.737 119.915,59.207 119.915,94.132 119.931,94.147 98.285,94.147 98.27,94.162 98.27,57.009 98.255,57.009
GND on Top Layer "Top Layer-No Net" (solid, remove dead copper, pour order 10): 63.5,66.675 63.5,94.149 64.234,94.884 64.241,94.876 68.425,94.876 69.208,94.876 69.215,94.869 69.215,99.525 69.912,100.222 69.928,100.206 71.888,100.206 119.278,100.206 119.81,99.674 119.906,99.578 119.906,94.193 98.319,94.193 98.31,94.184 98.31,56.978 98.318,56.97 90.835,56.97 90.402,57.403 90.056,57.749 90.056,59.544 90.056,62.217 90.043,62.23 72.771,62.23 72.771,58.039 72.771,57.667 72.149,57.044 72.127,57.023 69.342,57.023 68.911,57.023 68.545,57.389 68.213,57.721 68.213,58.59 68.213,65.645 68.199,65.659 64.389,65.659 64.115,65.659 63.51,66.265 63.5,66.274 63.5,66.675

## Keep-outs
Keep-Out Layer:
  lines w0.2: 69.215,99.06 cw(c70.294,99.123) 70.358,100.203 ; 69.215,99.187 69.215,94.869 64.643,94.869 ccw(c64.579,93.789) 63.5,93.726 63.5,66.675 ccw(c64.453,66.611) 64.389,65.659 68.199,65.659 68.199,58.166 ccw(c69.278,58.102) 69.342,57.023 71.628,57.023 ccw(c71.691,58.102) 72.771,58.039 72.771,62.23 74.041,62.23 ; 70.231,100.203 118.872,100.203 cw(c118.935,99.251) 119.888,99.187 ; 73.533,62.23 90.043,62.23 90.043,58.039 ; 90.043,58.166 ccw(c91.123,58.102) 91.059,57.023 92.329,57.023 114.808,57.023 ; 114.173,57.023 118.745,57.023 ccw(c118.808,58.102) 119.888,58.166 119.888,99.314

## Other copper
Top Layer:
  rectangle net NetC21_1: 109.22,73.01 111.394,75.398
  rectangle net NetC20_2: 109.226,65.981 111.399,68.369
  rectangle net NetC22_2: 109.194,69.405 111.368,71.794
  pour cut-out: 107.878,78.961 112.724,78.961 112.752,78.989 112.752,57.054 112.771,57.035 107.998,57.035 107.954,56.992 107.839,57.107 107.839,57.119
  pour cut-out: 108.933,78.962 108.933,79.284 109.746,80.097 109.746,82.106 110.85,82.106 110.881,82.075 110.881,79.897 111.617,79.161 111.617,78.44
Bottom Layer:
  pour cut-out: 107.835,57.003 107.835,62.05 112.77,62.05 112.77,56.978

## Silkscreen, mask and mechanical layers (free items; w line width, h text height)
Top Overlay:
  lines w0.2: 83.142,98.355 83.142,99.288 83.635,98.795 83.582,98.795 83.142,98.355
  text ">" at 108.331,97.069 h1.2 r90
  text "+" at 110.47,96.969 h1.2
  text ">" at 98.484,96.442 h1.2
  text "+" at 113.96,94.308 h1.2
  text "G" at 103.831,94.066 h1.2
  text "CS" at 99.494,94.02 h1.2
  text "D0" at 101.526,94.043 h1.2
  text "D2" at 105.651,94.043 h1.2
  text "SO" at 107.569,94.043 h1.2
  text "CK" at 109.601,94.035 h1.2
  text "SI" at 111.739,94.013 h1.2
  text "DBG" at 78.5,93.836 h1.2
  text "G" at 63.653,92.463 h1.2
  text "U3R" at 116.811,90.871 h1.2 r90
  text "R" at 83.052,90.341 h1.2
  text "T" at 80.384,90.313 h1.2
  text "G" at 77.003,90.256 h1.2
  text "U3T" at 116.846,88.14 h1.2 r90
  text "RDY" at 114.896,86.456 h1.2
  text "JLCJLC" at 84.638,81.369 h2
  text "JLCJLC" at 84.587,79.122 h2
  text "GND" at 75.143,72.412 h1.2
  text "5V" at 72.955,72.206 h1.2
  text "IRI" at 80.29,70.839 h1.2
  text "CBC Design" at 85.655,70.463 h2
  text "5V" at 68.123,68.207 h1.2
  text "T" at 68.528,64.89 h1.2
  text "2022.01" at 118.761,63.377 h2 r90
  text "AP1 Rev.A" at 117.004,63.207 h2 r90
  text "LCD" at 72.301,62.697 h1.2
  text "G" at 68.432,62.329 h1.2
  text "G" at 68.388,60.806 h1.2
  text "CGND" at 115.08,57.941 h1.2 r90
Bottom Overlay:
  lines w0.2: 65.944,71.116 65.944,72.639 66.631,73.326 68.026,73.326 68.626,73.326 69.176,72.776 69.176,71.215 68.878,70.916 66.143,70.916 65.944,71.116 ; 66.931,79.935 66.996,79.871 70.597,79.871 70.728,80.002 70.728,81.252 70.457,81.523 67.017,81.523 66.931,81.438 66.931,79.935
Mechanical 1:
  lines w0.2: 69.215,99.06 cw(c70.294,99.123) 70.358,100.203 ; 69.215,99.187 69.215,94.869 64.643,94.869 ccw(c64.579,93.789) 63.5,93.726 63.5,66.675 ccw(c64.453,66.611) 64.389,65.659 68.199,65.659 68.199,58.166 ccw(c69.278,58.102) 69.342,57.023 71.628,57.023 ccw(c71.691,58.102) 72.771,58.039 72.771,62.23 74.041,62.23 ; 70.231,100.203 118.872,100.203 cw(c118.935,99.251) 119.888,99.187 ; 73.533,62.23 90.043,62.23 90.043,58.039 ; 90.043,58.166 ccw(c91.123,58.102) 91.059,57.023 92.329,57.023 114.808,57.023 ; 114.173,57.023 118.745,57.023 ccw(c118.808,58.102) 119.888,58.166 119.888,99.314
Mechanical 11:
  circle w0.152: c66.212,63.347 r1
  circle w0.152: c66.212,97.147 r1
  lines w0.013: 119.511,56.851 121.111,56.851 121.111,57.06 132.097,57.06 132.097,61.147 128.377,61.147 128.377,65.747 132.097,65.747 132.097,94.947 128.377,94.947 128.377,100.06 121.097,100.06 121.097,86.086 119.511,86.086
  lines w0.152: 71.791,56.851 120.142,56.851 ; 72.263,56.851 64.101,56.851 cw(c64.101,57.651) 63.301,57.651 63.301,66.32 69.099,66.32 69.099,91.32 67.813,91.32 ccw(c66.52,92.845) 65.227,91.32 63.301,91.32 63.301,99.651 cw(c64.101,99.651) 64.101,100.451 120.146,100.451 120.146,56.851 ; 63.499,72.92 63.301,72.92 63.301,67.32 69.099,67.32 69.099,90.32 63.301,90.32 63.301,87.676 cw(c64.666,85.061) 63.301,82.446 63.301,80.12 63.583,80.12 63.583,80.119 65.099,80.119 cw(c65.099,79.319) 65.899,79.319 65.899,73.719 cw(c65.099,73.719) 65.099,72.919 63.499,72.919 ; 63.499,72.919 63.499,72.92
  lines w0.2: 65.408,85.147 ccw(c64.77,85.09) 65.411,85.082

## Dimensions
118.241,100.451 to 118.491,86.106 on Mechanical 15
119.888,99.314 to 63.5,93.726 on Mechanical 11
120.142,56.851 to 116.008,100.311 on Mechanical 11